# EAGLE board shared_pcb (EAGLE 7.5.0)
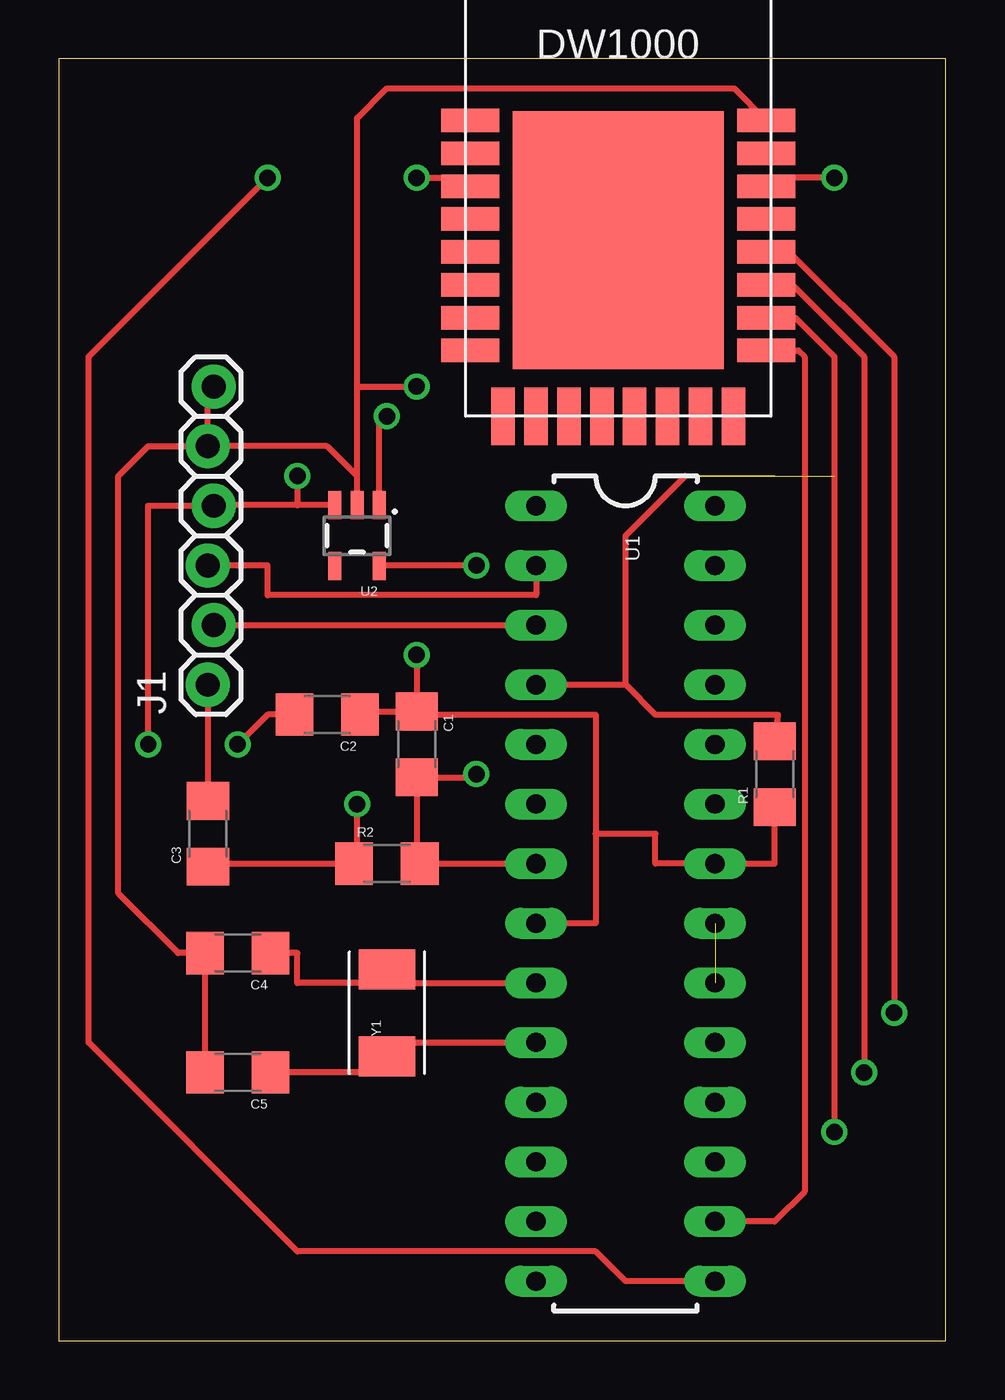
[diagram p0: board, top side]
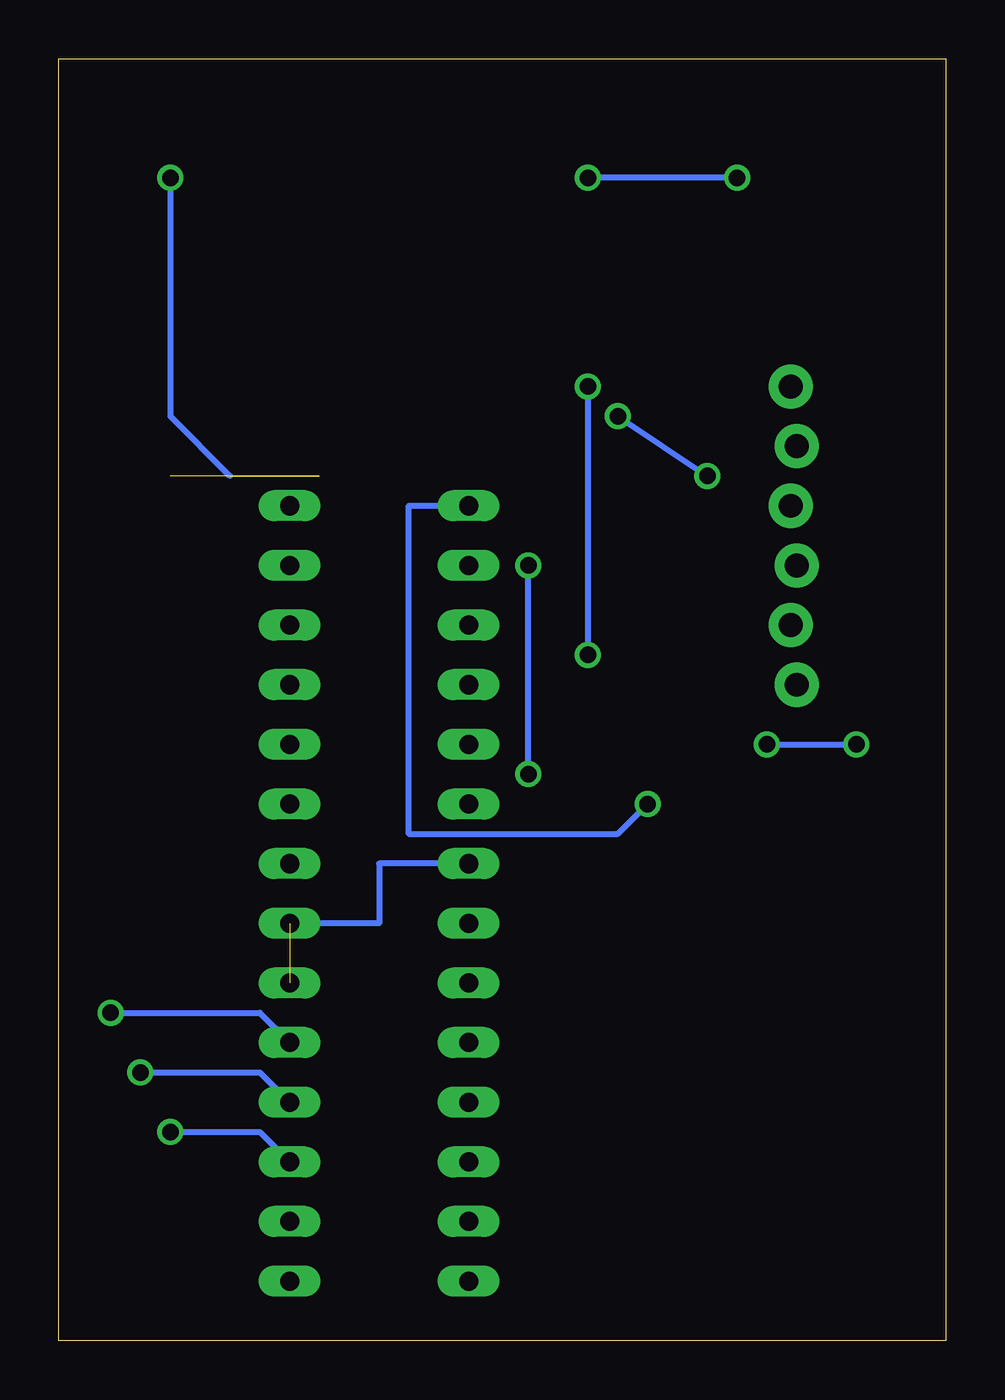
[diagram p1: board, bottom side, seen from below]

Size 37.77 x 54.6 mm. Coordinates in mm from the lower left corner, seen from the top.
Outline: 0,0 37.77,0 37.77,54.6 0,54.6 0,0
Copper layers (1*16): Top 0.035mm / dielectric 1.5mm / Bottom 0.035mm
Design rules "default": minimum track width 10mil, minimum drill 24mil, track to track 8mil, track to pad 8mil, pad to pad 8mil, via to via 8mil, smd to smd 8mil, copper to edge 40mil, drill to drill 8mil, minimum pad ring 10mil, minimum via ring 8mil, stop-mask expansion 4mil, vias tented up to drill 0mil, thermal gap 10mil

## Footprints (pad centres in the part's own frame; a part is rotated, then mirrored left to right if it is on the bottom)
1206 = smd 1.6 x 1.8: 1 -1.4,0; 2 1.4,0
1X06_LOCK = drill 1.016 pad 1.88: 1 0,0; 2 2.54,-0.254; 3 5.08,0; 4 7.62,-0.254; 5 10.16,0; 6 12.7,-0.254
DIL28-3 = drill 0.813 long: 1 -16.51,-3.81; 2 -13.97,-3.81; 3 -11.43,-3.81; 4 -8.89,-3.81; 5 -6.35,-3.81; 6 -3.81,-3.81; 7 -1.27,-3.81; 8 1.27,-3.81; 9 3.81,-3.81; 10 6.35,-3.81; 11 8.89,-3.81; 12 11.43,-3.81; 13 13.97,-3.81; 14 16.51,-3.81; 15 16.51,3.81; 16 13.97,3.81; 17 11.43,3.81; 18 8.89,3.81; 19 6.35,3.81; 20 3.81,3.81; 21 1.27,3.81; 22 -1.27,3.81; 23 -3.81,3.81; 24 -6.35,3.81; 25 -8.89,3.81; 26 -11.43,3.81; 27 -13.97,3.81; 28 -16.51,3.81
SOT23-5 = smd 0.55 x 1.2: 1 -0.95,-1.3; 2 0,-1.3; 3 0.95,-1.3; 4 0.95,1.3; 5 -0.95,1.3
DWM1000 = smd 2.45 x 1: EXTON -2.8,12.6; GPIO7 -2.8,8.4; IRQ/GPIO8 9.8,9.8; RST -2.8,9.8; SPICLK 9.8,7; SPICSN 9.8,2.8; SPIMISO 9.8,5.6; SPIMOSI 9.8,4.2; VDD3V3 -2.8,4.2; VDD3V3.2 -2.8,5.6; VDDAON -2.8,7; VSS -2.8,2.8; VSS.2 9.8,12.6; VSS.3 9.8,11.2; VSS.4 9.8,8.4; WAKEUP -2.8,11.2 | smd 9 x 11: GND 3.5,7.5 | smd 1 x 2.45: GPIO0 7,0; GPIO1 5.6,0; GPIO2 4.2,0; GPIO3 2.8,0; GPIO4 1.4,0; GPIO5 0,0; GPIO6 -1.4,0; VSS.5 8.4,0
CRYSTAL-TXC-7A = smd 1.7 x 2.4: P$1 1.85,0; P$2 -1.85,0

## Placement (x,y rotation side)
C1  2.2uF  [1206]  15.24,25.4 270 top
C2  1uF  [1206]  11.43,26.67 180 top
C3  100nF  [1206]  6.35,21.59 90 top
C4  18pF  [1206]  7.62,16.51 180 top
C5  18pF  [1206]  7.62,11.43 180 top
J1  [1X06_LOCK]  6.35,27.94 90 top
R1  10K  [1206]  30.48,24.13 90 top
R2  10K  [1206]  13.97,20.32 0 top
U1  ATMEGA328P_PDIP  [DIL28-3]  24.13,19.05 270 top
U2  3.3V/150mA  [SOT23-5]  12.7,34.29 180 top
U$1  DWM1000  [DWM1000]  20.32,39.37 0 top
Y1  8MHz  [CRYSTAL-TXC-7A]  13.97,13.97 90 top

## Library data of the parts
C1-C5 = SparkFun-Capacitors
J1 = SparkFun-Connectors
R1 R2 = SparkFun-Passives
U1 = SparkFun-DigitalIC
U2 = SparkFun-PowerIC; PROD_ID: VREG-00822
U$1 = DWM1000
Y1 = SparkFun-FreqCtrl

## Nets
CHIP_RST: C3.1 R2.1 U1.1
CLK: U1.19 U$1.SPICLK
CSN: U1.16 U$1.SPICSN
DW_RST: U1.15 U$1.RST
GND: C1.1 C2.1 C4.2 C5.2 J1.5 J1.6 R1.1 U1.8 U1.22 U2.2 U$1.VSS.2
IRQ: R1.2 U1.4 U$1.IRQ/GPIO8
MISO: U1.18 U$1.SPIMISO
MOSI: U1.17 U$1.SPIMOSI
N$1: C4.1 U1.9 Y1.P$1
N$2: C2.2 J1.4 U2.1 U2.3
N$3: C3.2 J1.1
N$4: C5.1 U1.10 Y1.P$2
RXD: J1.3 U1.2
TXD: J1.2 U1.3
VCC: C1.2 R2.2 U1.7 U1.20 U1.21 U2.5

## Tracks (layer width: path | path; a pad name or v marks a point on that pad's centre or on a via)
CHIP_RST  (via drill 0.7)
  Top 0.254: C3.1 6.35,20.32 R2.1 12.7,20.32 v12.7,22.86
  Bottom 0.254: U1.1 22.86,35.56 22.86,21.59 13.97,21.59 v12.7,22.86
CLK  (via drill 0.7)
  Top 0.254: U$1.SPICLK 31.1,46.37 35.56,41.91 v35.56,13.97
  Bottom 0.254: v35.56,13.97 29.21,13.97 U1.19
CSN
  Top 0.254: U$1.SPICSN 31.49,42.17 31.75,41.91 31.75,6.35 30.48,5.08 U1.16
DW_RST  (via drill 0.7)
  Top 0.254: U1.15 24.13,2.54 22.86,3.81 10.16,3.81 1.27,12.7 1.27,41.91 v8.89,49.53 | v15.24,49.53 17.16,49.53 U$1.RST
  Bottom 0.254: v8.89,49.53 v15.24,49.53
GND  (via drill 0.7)
  Top 0.254: C5.2 C4.2 5.08,16.51 2.54,19.05 2.54,36.83 3.81,38.1 J1.5 | J1.5 6.35,40.39 J1.6 | 12.7,36.83 11.43,38.1 J1.5 | 12.7,36.83 12.7,40.64 | 12.7,40.64 12.7,52.07 13.97,53.34 28.75,53.34 U$1.VSS.2 | C2.1 12.83,26.8 C1.1 | U2.2 12.7,36.83 | 12.7,40.64 v15.24,40.64 | v15.24,29.21 C1.1 | C1.1 arc90 15.37,26.67 22.86,26.67 22.86,21.59 | 22.86,21.59 22.86,17.78 U1.8 | 22.86,21.59 25.4,21.59 25.4,20.32 U1.22 30.48,20.32 R1.1
  Bottom 0.254: v15.24,40.64 v15.24,29.21
IRQ  (via drill 0.7)  (2 unrouted)
  Top 0.254: U1.4 24.13,27.94 | 24.13,27.94 25.4,26.67 30.61,26.67 R1.2 | 24.13,27.94 24.13,34.29 26.67,36.83 | v33.02,49.53 30.48,49.53 U$1.IRQ/GPIO8
  Bottom 0.254: v33.02,49.53 33.02,39.37 30.48,36.83
MISO  (via drill 0.7)
  Top 0.254: U$1.SPIMISO 31.23,44.97 34.29,41.91 v34.29,11.43
  Bottom 0.254: v34.29,11.43 29.21,11.43 U1.18
MOSI  (via drill 0.7)
  Top 0.254: U$1.SPIMOSI 31.36,43.57 33.02,41.91 v33.02,8.89
  Bottom 0.254: v33.02,8.89 29.21,8.89 U1.17
N$1
  Top 0.254: 13.97,15.24 U1.9 | Y1.P$1 13.97,15.24 | 13.97,15.24 10.16,15.24 10.16,16.51 C4.1
N$2  (via drill 0.7)
  Top 0.254: U2.3 10.16,35.59 | 10.16,35.59 6.63,35.59 J1.4 3.81,35.56 v3.81,25.4 | C2.2 8.89,26.67 v7.62,25.4 | U2.1 13.65,39.37 v13.97,39.37 | v10.16,36.83 10.16,35.59
  Bottom 0.254: v7.62,25.4 v3.81,25.4 | v13.97,39.37 v10.16,36.83
N$3
  Top 0.254: J1.1 C3.2
N$4
  Top 0.254: U1.10 13.97,12.7 Y1.P$2 13.97,11.43 C5.1
RXD
  Top 0.254: U1.2 20.32,31.75 8.89,31.75 8.89,33.02 J1.3
TXD
  Top 0.254: J1.2 U1.3
VCC  (via drill 0.7)  (1 unrouted)
  Top 0.254: U1.7 R2.2 15.24,20.32 C1.2 17.65,24 v17.78,24.13 | v17.78,33.02 13.68,33.02 U2.5
  Bottom 0.254: U1.7 24.13,20.32 24.13,17.78 U1.21 | v17.78,24.13 v17.78,33.02